# Altium PCB Mecabot_PCB.PcbDoc
Units mm, origin at the board's own origin, x right, y up, seen from the top; angles counter-clockwise.
Board outline 101.4 x 86.36 mm, 2 copper layers (Top Layer, Bottom Layer); 75 components, 54 nets, 283 pads, 69 vias.
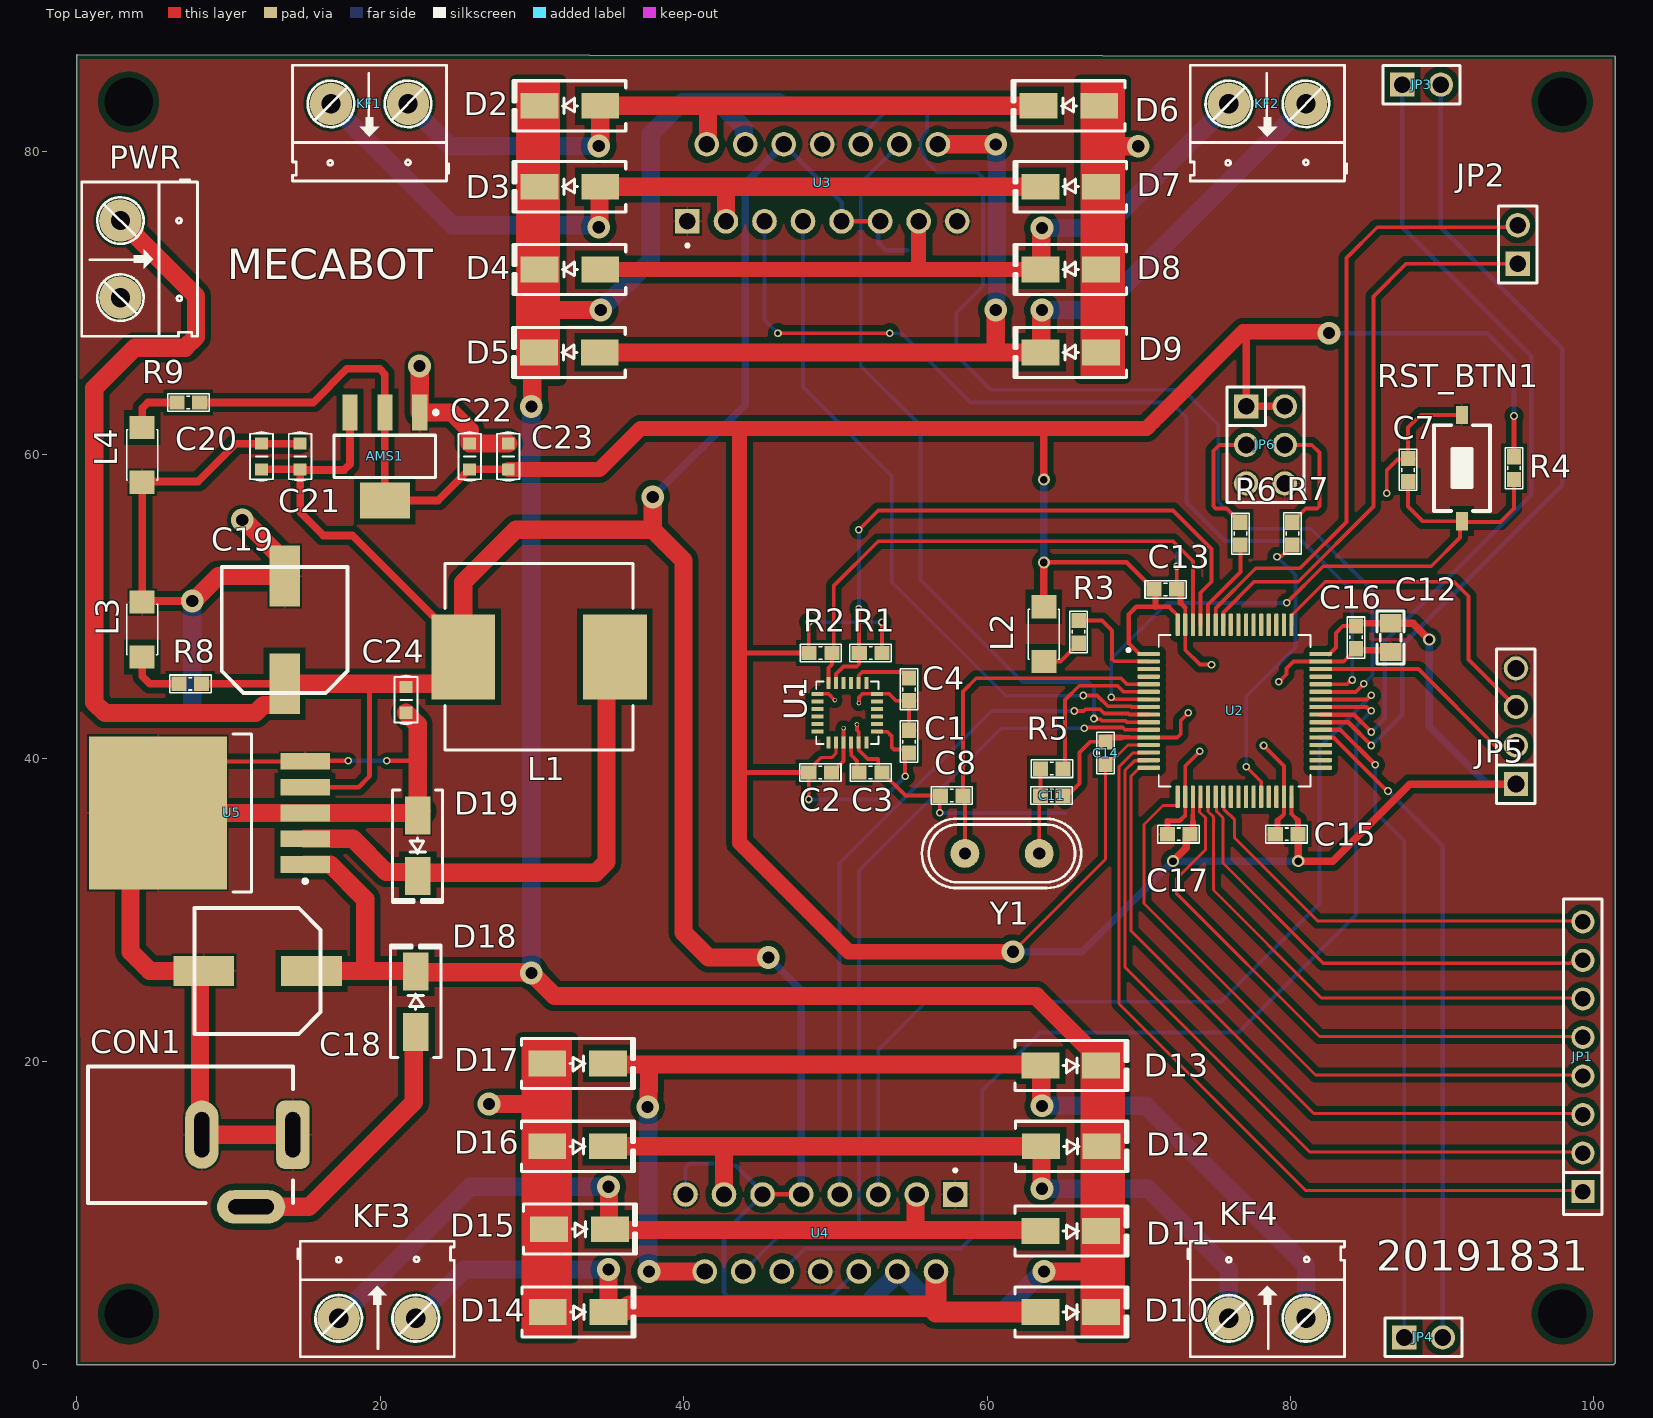
[diagram p0: Top Layer view]
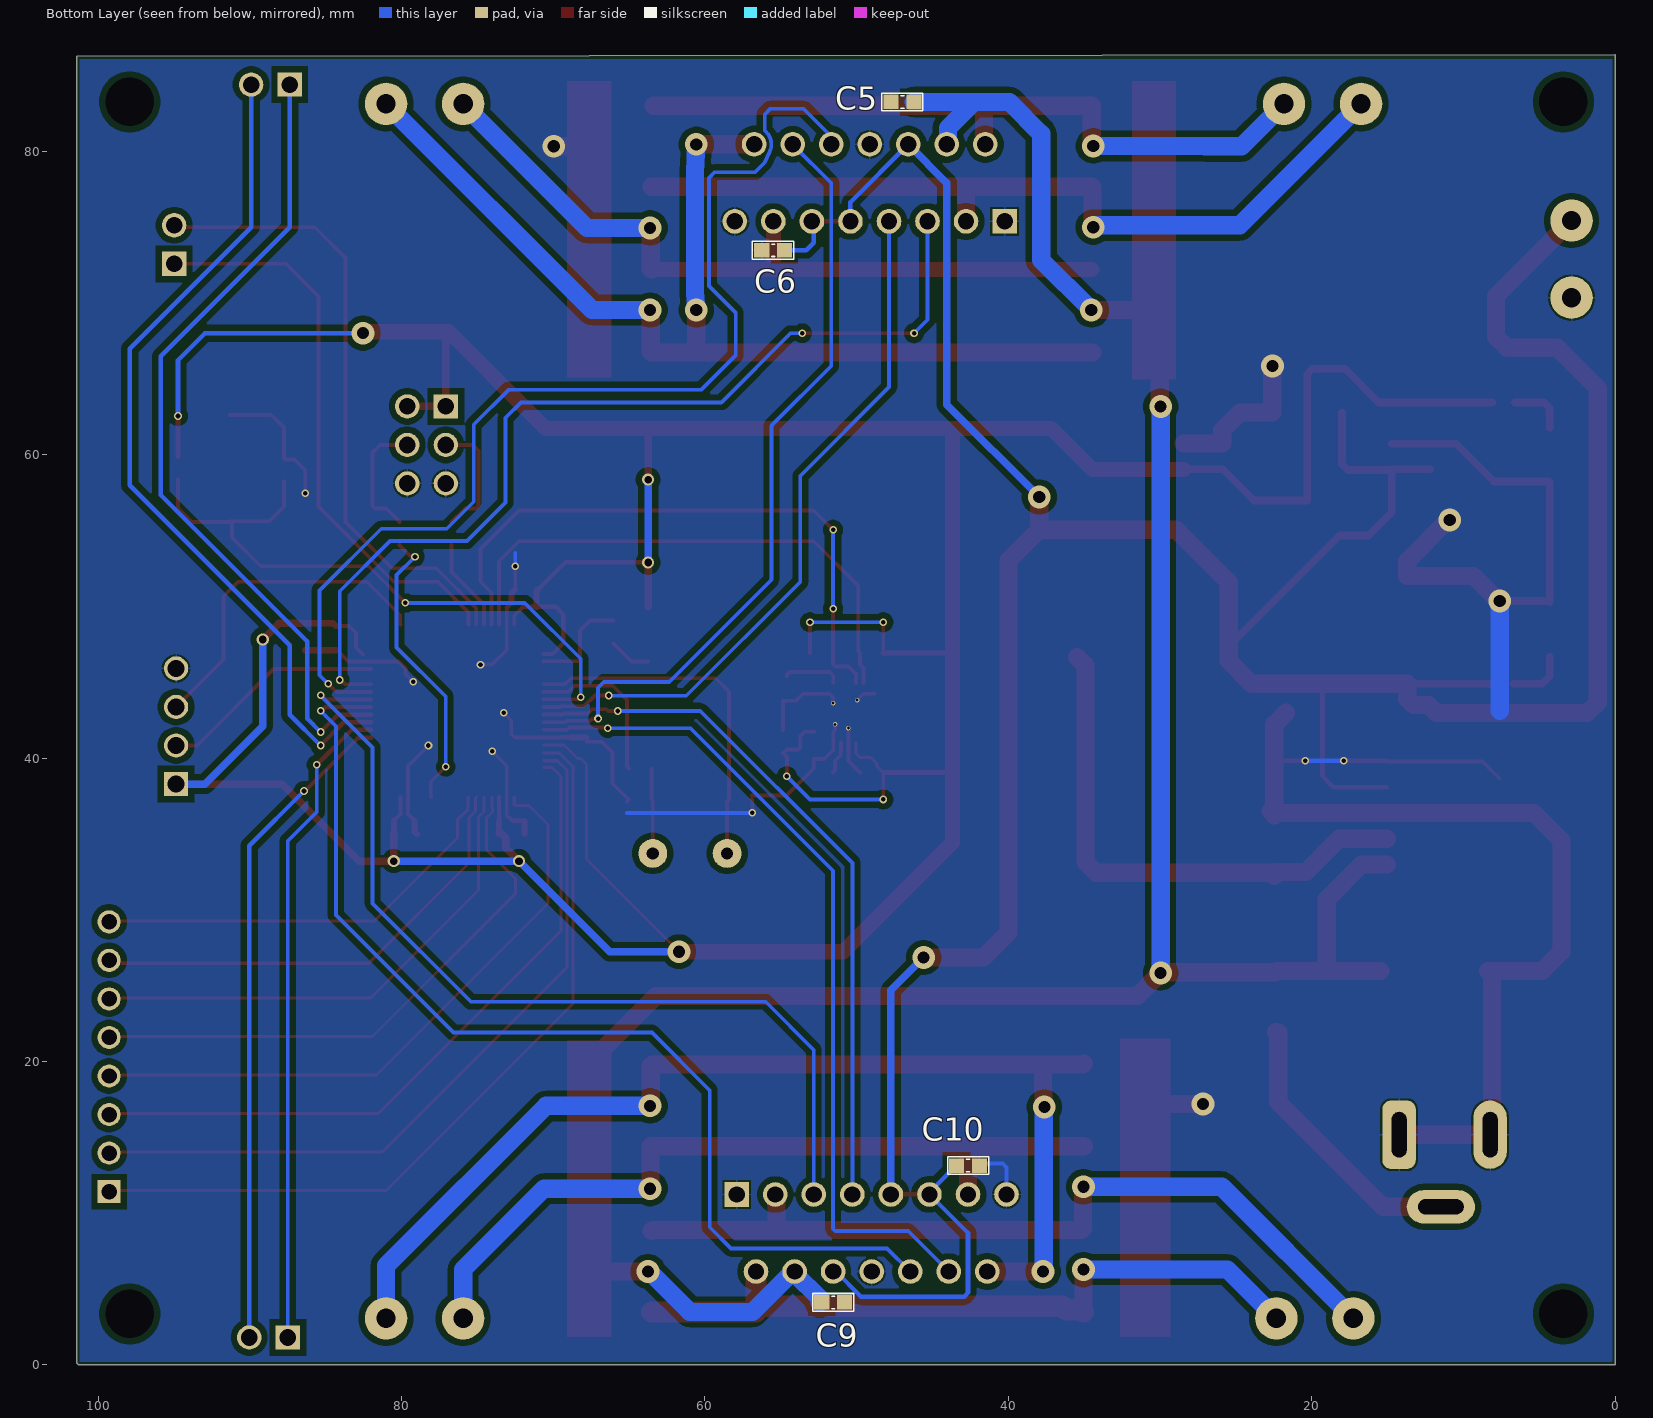
[diagram p1: Bottom Layer view, seen from below]
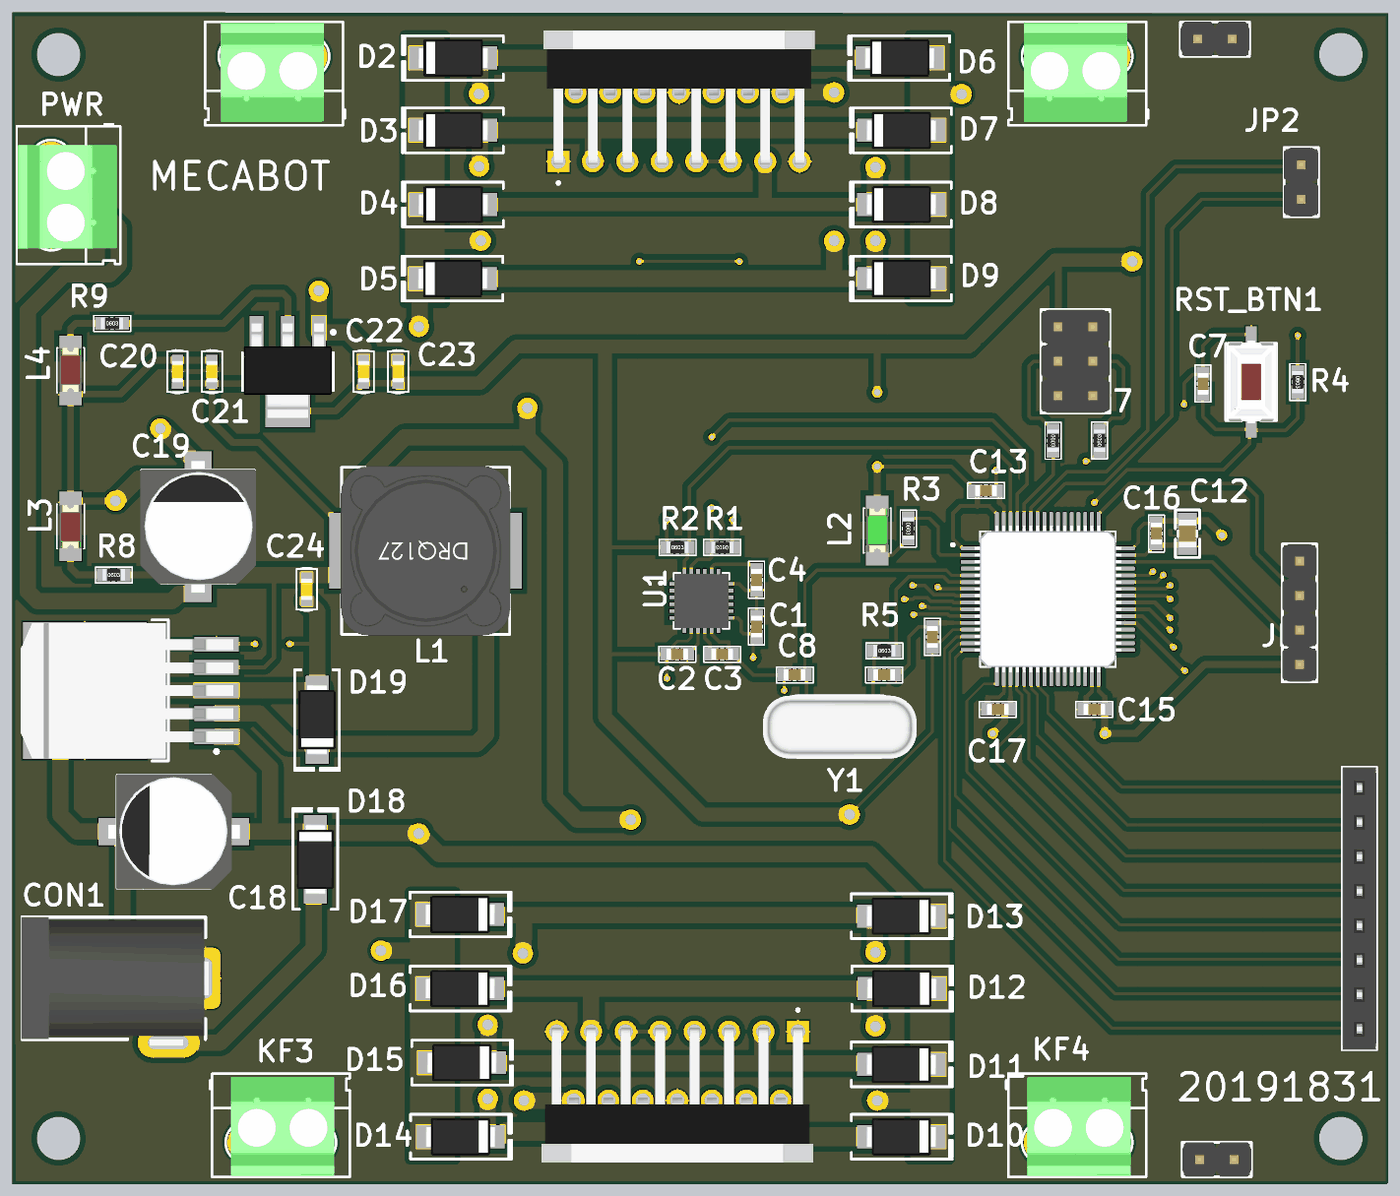
[diagram p2: 3D render of the assembled board from above, using the file's embedded part models]
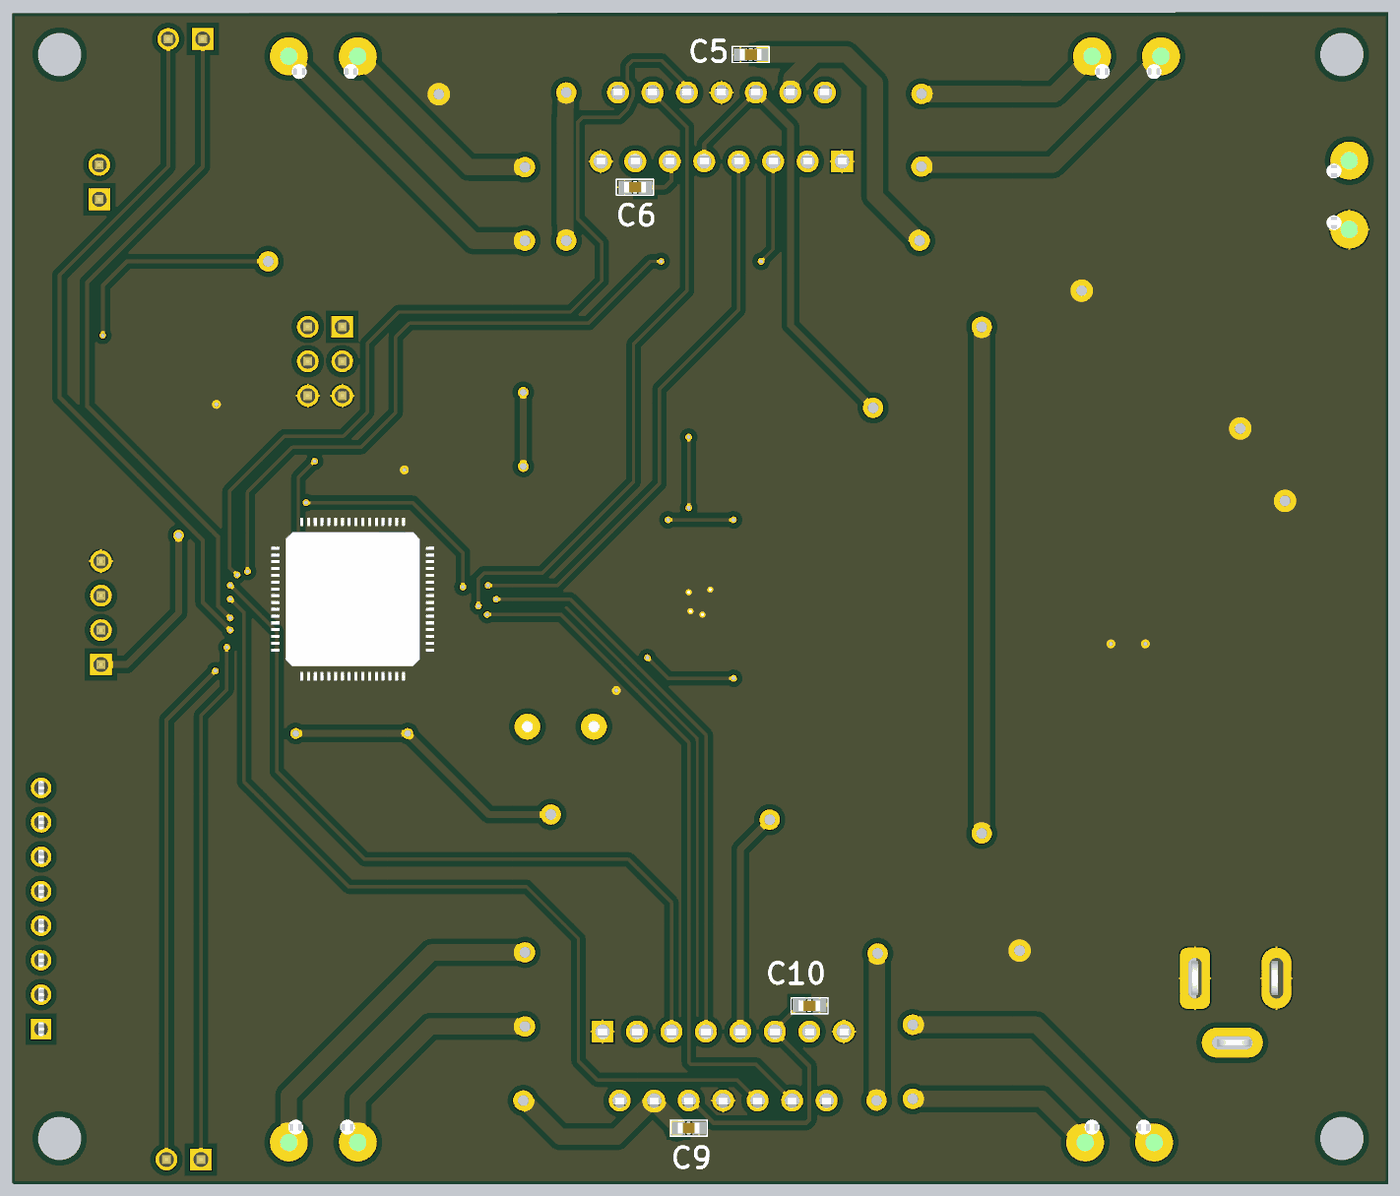
[diagram p3: 3D render of the assembled board from below, using the file's embedded part models]

## Layer stack, top to bottom
Top Solder: solder mask 0.0102, Solder Resist, Dk 3.5
Top Layer: signal copper 0.0356
Dielectric 1: dielectric 0.32, FR-4, Dk 4.8
Bottom Layer: signal copper 0.0356
Bottom Solder: solder mask 0.0102, Solder Resist, Dk 3.5

## Board outline
0.027,86.356 0,86.329 0,0 101.275,0 101.4,0.125 101.4,86.275

## Design rules (kind name [scope] priority, off if disabled: settings)
BoardOutlineClearance [All] p1: gap=0.2 ignorepadtopadclearanceinfootprint=FALSE
Clearance [All] p1: gap=0.2 ignorepadtopadclearanceinfootprint=FALSE
ComponentClearance [All] p1: gap=0.127 collisioncheckmode=3 verticalgap=0.127 showdistances=TRUE
DiffPairsRouting [All] p1: maxlimit=0.254 minlimit=0.127 mostfreqgap=0.127 toplayer_minwidth=0.127 toplayer_maxwidth=25.4 toplayer_prefwidth=0.127 bottomlayer_minwidth=0.127 bottomlayer_maxwidth=25.4 bottomlayer_prefwidth=0.127 maxuncoupledlength=12.7
Height [All] p1: minheight=0 maxheight=1816.048 prefheight=12.7
HoleSize [All] p1: absolutevalues=TRUE maxlimit=6.3 minlimit=0.2 maxpercent=80.000 minpercent=20.000
HoleToHoleClearance [All] p1: gap=0.25 allowstackedmicrovias=FALSE
MinimumAnnularRing [All] p1: minimumring=0.05
MinimumSolderMaskSliver [All] p1: minsoldermaskwidth=0
PlaneClearance [All] p1: clearance=0.127
PlaneConnect PlaneConnectPowerPads [InPadClass('PowerPads')] p1: planeconnectstyle=Direct reliefexpansion=0.508 reliefentries=4 reliefconductorwidth=0.254 reliefairgap=0.254
PlaneConnect [All] p2: pad.planeconnectstyle=Relief pad.reliefexpansion=0.3 pad.reliefentries=4 pad.reliefconductorwidth=0.127 pad.reliefairgap=0.127 via.planeconnectstyle=Direct via.reliefexpansion=0.3 via.reliefentries=4 via.reliefconductorwidth=0.127 via.reliefairgap=0.127
PolygonConnect PolygonConnectPowerPads [All vs (InPadClass('PowerPads'))] p1: connectstyle=Direct reliefconductorwidth=0.254 reliefentries=4 polygonreliefangle="90 Angle" airgapwidth=0.254
PolygonConnect [All] p2: thpad.connectstyle=Relief thpad.reliefconductorwidth=0.127 thpad.reliefentries=4 thpad.polygonreliefangle="90 Angle" thpad.airgapwidth=0.127 smdpad.connectstyle=Relief smdpad.reliefconductorwidth=0.127 smdpad.reliefentries=4 smdpad.polygonreliefangle="90 Angle" smdpad.airgapwidth=0.127 via.connectstyle=Direct via.reliefconductorwidth=0.127 via.reliefentries=4 via.polygonreliefangle="90 Angle" via.airgapwidth=0.127
RoutingVias [All] p1: holewidth=0.3 width=0.5 viastyle="Through Hole" minholewidth=0.2 minwidth=0.3 maxholewidth=0.8 maxwidth=1.5
SilkToSilkClearance [All] p1: silktosilkclearance=0
SilkToSolderMaskClearance [IsPad] p1: minsilkscreentomaskgap=0.04 clearancetoexposedcopper=TRUE
SolderMaskExpansion [All] p1: expansion=0.075 istentingtop=FALSE
UnRoutedNet [All] p1: checkbadconnections=TRUE
Width [All] p1: maxlimit=2 minlimit=0.127 preferedwidth=0.3 minimp=50.000000 maximp=50.000000 favimp=50.000000
19 further rules are at their usual default settings.

## Components (designator, comment, footprint, x,y, rotation, side; value= is the part's Value field where it differs from the comment)
AMS1 "AMS1117-3.3V" SOT223 20.308,59.879 r180 top value="AMS1117-3.3V SOT223"
C1 "100nF" "tu 0603" 54.852,41.083 r90 top
C2 "10nF" "tu 0603" 48.998,39.051 r0 top
C3 "100nF" "tu 0603" 52.312,39.051 r0 top
C4 "2.2nF" "tu 0603" 54.852,44.524 r90 top
C5 "100nF" "tu 0603" 46.978,83.247 r0 bottom
C6 "100nF" "tu 0603" 55.499,73.468 r0 bottom
C7 "100nF" "tu 0603" 87.745,58.99 r90 top
C8 "20pF" "tu 0603" 57.658,37.527 r0 top
C9 "100nF" "tu 0603" 51.55,4.126 r180 bottom
C10 "100nF" "tu 0603" 42.66,13.143 r180 bottom
C11 "20pF" "tu 0603" 64.262,37.527 r180 top
C12 "4.7uF" "tu 0805" 86.602,47.941 r270 top
C13 "100nF" "tu 0603" 71.755,51.116 r0 top
C14 "100nF" "tu 0603" 67.806,40.321 r90 top
C15 "100nF" "tu 0603" 79.744,34.987 r180 top
C16 "100nF" "tu 0603" 84.316,47.953 r270 top
C17 "100nF" "tu 0603" 72.632,34.987 r180 top
C18 "100uF" "tu nhom 8 (f)" 11.92,25.97 r180 top
C19 "220uF" "tu nhom 8 (f)" 13.704,48.449 r90 top
C20 "10uF" "C 0603" 12.18,59.879 r90 top
C21 "100nF" "C 0603" 14.72,59.879 r90 top
C22 "10uF" "C 0603" 25.896,59.879 r90 top
C23 "100nF" "C 0603" 28.436,59.879 r90 top
C24 "0.1uF" "C 0603" 21.705,43.838 r270 top
CON1 "CON DC PWR" CONN/DC/PWR/5.0MM 14.243,15.175 r0 top
D2 "M7" "DIODE SMA" 32.5,82.993 r180 top
D3 "M7" "DIODE SMA" 32.5,77.659 r180 top
D4 "M7" "DIODE SMA" 32.5,72.198 r180 top
D5 "M7" "DIODE SMA" 32.468,66.737 r180 top
D6 "M7" "DIODE SMA" 65.393,82.993 r180 top
D7 "M7" "DIODE SMA" 65.52,77.659 r180 top
D8 "M7" "DIODE SMA" 65.52,72.198 r180 top
D9 "M7" "DIODE SMA" 65.52,66.737 r180 top
D10 "M7" "DIODE SMA" 65.52,3.491 r0 top
D11 "M7" "DIODE SMA" 65.52,8.825 r0 top
D12 "M7" "DIODE SMA" 65.552,14.413 r0 top
D13 "M7" "DIODE SMA" 65.52,19.747 r0 top
D14 "M7" "DIODE SMA" 33.04,3.491 r0 top
D15 "M7" "DIODE SMA" 33.135,8.952 r0 top
D16 "M7" "DIODE SMA" 33.008,14.413 r0 top
D17 "M7" "DIODE SMA" 33.008,19.874 r0 top
D18 "SS34" "DIODE SMA" 22.34,23.938 r90 top
D19 "SS34" "DIODE SMA" 22.467,34.225 r270 top
JP1 "JP 1x8 2.54" "JP 1x8 CT" 99.27,11.427 r90 top
JP2 "JP 1x2 2.54" "JP 1x2 DT" 94.984,72.579 r90 top
JP3 "JP 1x2 2.54" "JP 1x2 DT" 87.364,84.39 r0 top
JP4 "JP 1x2 2.54" "JP 1x2 DT" 87.491,1.813 r0 top
JP5 "SWD" "JP 1x4 DT" 94.857,38.289 r90 top
JP6 "JP 2x3 2.54" "JP 2x3 DT" 78.347,60.641 r270 top
KF1 "CON 2 KF301" "Con 2 KF301 5.08" 21.832,83.12 r180 top
KF2 "CON 2 KF301" "Con 2 KF301 5.08" 81.014,83.12 r180 top
KF3 "CON 2 KF301" "Con 2 KF301 5.08" 17.26,3.072 r0 top
KF4 "CON 2 KF301" "Con 2 KF301 5.08" 75.934,3.072 r0 top
L1 "33uH 3A" "Inductor SMD 12x12x8" 30.468,46.671 r180 top
L2 "LED 0805" LED-1206-Green 63.742,49.973 r270 top
L3 "LED 0805" LED-1206-Red 4.306,46.671 r90 top
L4 "LED 0805" LED-1206-Red 4.306,61.784 r270 top
PWR "CON 2 KF301" "Con 2 KF301 5.08" 2.875,75.43 r270 top (schematic designator KF5)
R1 "4k7" "tro smd 0603" 52.324,46.925 r180 top
R2 "4k7" "tro smd 0603" 49.022,46.925 r0 top
R3 "1k" "tro smd 0603" 66.028,48.322 r270 top
R4 "10k" "tro smd 0603" 94.73,59.117 r270 top
R5 "0R" "tro smd 0603" 64.262,39.305 r0 top
R6 "10k" "tro smd 0603" 76.696,54.799 r270 top
R7 "10k" "tro smd 0603" 80.125,54.799 r90 top
R8 "1k" "tro smd 0603" 7.481,44.893 r0 top
R9 "1k" "tro smd 0603" 7.354,63.435 r0 top
RST_BTN1 "Nut Nhan 2 Chan SMD 3x6x2.5" "Nut Nhan 2 Chan SMD 3x6x2.5" 91.301,59.117 r90 top
U1 "MPU-6050" QFN50P400X400X95-24N 50.788,42.988 r0 top
U2 "STM32F103RCT6" QFP50P1200X1200X160-64N 76.315,43.115 r0 top
U3 "L298N" L298N 40.247,75.373 r90 top
U4 "L298N" L298N 57.9,11.238 r270 top
U5 "LM2596S-5.0" TO-263-5 8.751,36.384 r180 top
Y1 "8Mhz" "Thach Anh 2 chan cam" 60.985,33.717 r0 top value=4Mhz

## Footprints (in the part's own frame and the unit in brackets; to place one, negate y for a bottom-side part, rotate by r counter-clockwise, add the part's x,y. Pads: shape width x height; smd on the part's side, far side on the other; paste and mask are expansions set on the pad)
"C 0603" [mm] "Chip Capacitor, 2-Leads, Body 1.6x0.8mm, IPC Medium Density"
  rect 0.8x0.85 smd: 1(-0.85,0) 2(0.85,0)
  silkscreen extent -1.6,-0.75 1.6,0.75, body extent -0.8,-0.43 0.8,0.43, height 0.81
"Con 2 KF301 5.08" [mil]
  round 110 hole 50: 1(0,0) 2(200,0)
  silkscreen extent -106,-100 300,200, body extent -45,-97 255,190, height 335
CONN/DC/PWR/5.0MM [mm]
  rrect50% 2.2x4.5 hole 1 slot 3 at 90 deg: 1(0,0)
  oval 2.2x4.5 hole 1 slot 3 at 90 deg: 2(-6,0)
  oval 4.5x2.2 hole 1 slot 3 at 0 deg: 3(-2.75,-4.75)
  silkscreen extent -13.5,-4.5 0,4.5, body extent -13.58,-5 0.25,4.5, height 11.02
"DIODE SMA" [mm] "SMA"
  rect 2.5x1.7 smd: 1(-2,0) 2(2,0)
  silkscreen extent -3.68,-1.65 3.75,1.65, body extent -2.6,-1.37 2.6,1.37, height 2.4
"Inductor SMD 12x12x8" [mm] "Precision Wire Wound Inductor, 2-Leads, Body 12.3x12.3mm, IPC Low Density"
  rect 4.2x5.6 smd: 1(-5,0) 2(5,0)
  silkscreen extent -6.2,-6.15 6.2,6.15, body extent -6.25,-6.25 6.25,6.25, height 8.01
"JP 1x2 DT" [mm] "2 pins, 1 row, straight, gold plating"
  rect 1.6x1.6 hole 1.1: 1(0,0)
  round 1.6 hole 1.1: 2(2.54,0)
  silkscreen extent -1.27,-1.27 3.81,1.27, body extent -1.27,-1.27 3.81,1.27, height 8.54
"JP 1x4 DT" [mm] "4 pins, 1 row, straight, gold plating"
  rect 1.6x1.6 hole 1.1: 1(0,0)
  round 1.6 hole 1.1: 2(2.54,0) 3(5.08,0) 4(7.62,0)
  silkscreen extent -1.27,-1.27 8.89,1.27, body extent -1.27,-1.27 8.89,1.27, height 8.54
"JP 1x8 CT" [mm] "8 row, straight, gold plating"
  rect 1.52x1.52 hole 1.02: 1(0,0)
  round 1.52 hole 1.02: 2(2.54,0) 3(5.08,0) 4(7.62,0) 5(10.16,0) 6(12.7,0) 7(15.24,0) 8(17.78,0)
  silkscreen extent -1.52,-1.27 19.3,1.27, body extent -1.52,-1.25 19.3,1.25, height 8.51
"JP 2x3 DT" [mm]
  rect 1.6x1.6 hole 1.1: 1(-2.54,-1.27)
  round 1.6 hole 1.1: 2(0,-1.27) 3(2.54,-1.27) 4(2.54,1.27) 5(0,1.27) 6(-2.54,1.27)
  silkscreen extent -3.81,-2.54 3.81,2.54, body extent -3.81,-2.54 3.81,2.54, height 8.55
L298N [mm]
  rect 1.62x1.62 hole 1.08: 1(0,0)
  round 1.62 hole 1.08: 2(5.08,-1.27) 3(0,-2.54) 4(5.08,-3.81) 5(0,-5.08) 6(5.08,-6.35) 7(0,-7.62) 8(5.08,-8.89) 9(0,-10.16) 10(5.08,-11.43) 11(0,-12.7) 12(5.08,-13.97) 13(0,-15.24) 14(5.08,-16.51) 15(0,-17.78)
  silkscreen extent -1.69,-0.1 -1.49,0.1, body extent -0.24,-18.89 9.65,1.11, height 23.85
LED-1206-Green [mil]
  rect 60x65 smd: 1(0,0) 2(142,0)
  silkscreen extent 6,-40 136,40, body extent 7,-31 133,32, height 43
LED-1206-Red [mil]
  rect 60x65 smd: 1(0,0) 2(142,0)
  silkscreen extent 6,-40 136,40, body extent 7,-31 133,32, height 43
"Nut Nhan 2 Chan SMD 3x6x2.5" [mm] "Switch SMD type"
  rect 1.2x0.8 smd: 1(-3.5,0) 2(3.5,0)
  silkscreen extent -2.82,-1.85 2.82,1.85, body extent -3.05,-1.85 3.05,1.85, height 2.5
QFN50P400X400X95-24N [mm]
  rect 0.79x0.26 smd: 1(-1.97,1.25) 2(-1.97,0.75) 3(-1.97,0.25) 4(-1.97,-0.25) 5(-1.97,-0.75) 6(-1.97,-1.25) 13(1.97,-1.25) 14(1.97,-0.75) 15(1.97,-0.25) 16(1.97,0.25) 17(1.97,0.75) 18(1.97,1.25)
  rect 0.26x0.79 smd: 7(-1.25,-1.97) 8(-0.75,-1.97) 9(-0.25,-1.97) 10(0.25,-1.97) 11(0.75,-1.97) 12(1.25,-1.97) 19(1.25,1.97) 20(0.75,1.97) 21(0.25,1.97) 22(-0.25,1.97) 23(-0.75,1.97) 24(-1.25,1.97)
  silkscreen extent -3.1,-2.05 2.05,2.05, body extent -2,-2 2,2, height 0.93
QFP50P1200X1200X160-64N [mm]
  rrect50% 1.49x0.28 smd: 1(-5.67,3.75) 2(-5.67,3.25) 3(-5.67,2.75) 4(-5.67,2.25) 5(-5.67,1.75) 6(-5.67,1.25) 7(-5.67,0.75) 8(-5.67,0.25) 9(-5.67,-0.25) 10(-5.67,-0.75) 11(-5.67,-1.25) 12(-5.67,-1.75) 13(-5.67,-2.25) 14(-5.67,-2.75) 15(-5.67,-3.25) 16(-5.67,-3.75) 33(5.67,-3.75) 34(5.67,-3.25) 35(5.67,-2.75) 36(5.67,-2.25) 37(5.67,-1.75) 38(5.67,-1.25) 39(5.67,-0.75) 40(5.67,-0.25) 41(5.67,0.25) 42(5.67,0.75) 43(5.67,1.25) 44(5.67,1.75) 45(5.67,2.25) 46(5.67,2.75) 47(5.67,3.25) 48(5.67,3.75)
  rrect50% 0.28x1.49 smd: 17(-3.75,-5.67) 18(-3.25,-5.67) 19(-2.75,-5.67) 20(-2.25,-5.67) 21(-1.75,-5.67) 22(-1.25,-5.67) 23(-0.75,-5.67) 24(-0.25,-5.67) 25(0.25,-5.67) 26(0.75,-5.67) 27(1.25,-5.67) 28(1.75,-5.67) 29(2.25,-5.67) 30(2.75,-5.67) 31(3.25,-5.67) 32(3.75,-5.67) 49(3.75,5.67) 50(3.25,5.67) 51(2.75,5.67) 52(2.25,5.67) 53(1.75,5.67) 54(1.25,5.67) 55(0.75,5.67) 56(0.25,5.67) 57(-0.25,5.67) 58(-0.75,5.67) 59(-1.25,5.67) 60(-1.75,5.67) 61(-2.25,5.67) 62(-2.75,5.67) 63(-3.25,5.67) 64(-3.75,5.67)
  silkscreen extent -7.1,-5 5,5, body extent -6,-6 6,6, height 0.72
SOT223 [mm]
  rect 1x2.4 smd: 1(-2.3,-2.9) 2(0,-2.9) 3(2.3,-2.9)
  rect 3.3x2.4 smd: 4(0,2.9)
  silkscreen extent -3.48,-3.02 3.35,1.4, body extent -3.25,-3.56 3.25,3.4, height 1.68
"Thach Anh 2 chan cam" [mm]
  round 1.905 hole 0.8: 1(-2.45,0) 2(2.45,0)
  silkscreen extent -5.28,-2.29 5.21,2.29, body extent -5.68,-2.36 5.68,2.29, height 3.5
TO-263-5 [mm] "D2-PAK, 6-Pads, Body 8.9x10.4mm (max), IPC Medium Density"
  rect 3.25x1.1 smd: 1(-6.3,3.4) 2(-6.3,1.7) 3(-6.3,0) 4(-6.3,-1.7) 5(-6.3,-3.4)
  rect 9.1x10.1 smd: 6(3.4,0)
  silkscreen extent -6.43,-5.2 -1.55,5.2, body extent -7.56,-4.98 8.11,5.02, height 4.83
"tro smd 0603" [mm] "Chip Capacitor, 2-Leads, Body 1,60x0,80mm, IPC Medium Density"
  rect 1x0.95 smd mask+0.076: 1(-0.75,0) 2(0.75,0)
  silkscreen extent -1.35,-0.58 1.37,0.58, body extent -0.82,-0.42 0.82,0.43, height 0.44
"tu 0603" [mm] "Chip Capacitor, 2-Leads, Body 1,60x0,80mm, IPC Medium Density"
  rect 1x0.95 smd mask+0.076: 1(-0.75,0) 2(0.75,0)
  silkscreen extent -1.35,-0.58 1.37,0.58, body extent -0.8,-0.4 0.8,0.4, height 0.9
"tu 0805" [mm] "Compoment SMD 80x50mil"
  rect 1.2x1.4 smd: 1(-0.946,-0.003) 2(0.954,-0.003)
  silkscreen extent -1.75,-0.89 1.75,0.89, body extent -1.01,-0.64 1.01,0.63, height 0.61
"tu nhom 8 (f)" [mm]
  rect 4x2 smd: 1(-3.55,0) 2(3.55,0)
  silkscreen extent -4.15,-4.15 4.15,4.15, body extent -4.85,-4.25 4.85,4.25, height 10.5

## Part data
AMS1: library part "AMS1117 SMD", "Dán", Chung_Loai=Dán, Don_Vi=Con, Ma_Hang=MH000596
C1 C3 C5 C6 C7 C8 C9 C10 C11 C13 C14 C15 C16 C17: library part "Tu 0603 104 50V 10%", "Dán", Chung_Loai=Dán, Don_Vi=Con, Ma_Hang=MH004568, So_Chan=2, Ten_Linh_Kien="Tụ 0603 104-100nF 10% 50V"
C2: library part "Tu 0603 103 50V 10%", "Dán", Chung_Loai=Dán, Don_Vi=Con, Ma_Hang=MH004567, So_Chan=2, Ten_Linh_Kien="Tụ 0603 103-10nF 10% 50V"
C4: library part "Tu 0603 22pF 50V 10%", "Dán", Chung_Loai=Dán, Don_Vi=Con, Ma_Hang=MH004570, So_Chan=2, Ten_Linh_Kien="Tụ 0603 22pF 50V 10%"
C12: library part "Tu 0805 475 25V 20%", "Dán", Chung_Loai=Dán, Don_Vi=Con, Ma_Hang=MH004276, So_Chan=2, Ten_Linh_Kien="Tụ 0805 475-4.7uF 20% 25V"
C18: library part "Tu Nhom 100uF 50V", "Dán", Chung_Loai=Dán, Don_Vi=Con, Ma_Hang=MH002223, So_Chan=2, Ten_Linh_Kien="Tụ Nhôm 100uF 50V 8x10.2MM"
C19: library part "Tu Nhom 220uF 25V", "Dán", Chung_Loai=Dán, Don_Vi=Con, Ma_Hang=MH002221, So_Chan=2, Ten_Linh_Kien="Tụ Nhôm 220uF 25V"
C20 C21 C22 C23 C24: library part "Capacitor NP", "Capacitor non-pol"
CON1: "DC input connector"
D2 D3 D4 D5 D6 D7 D8 D9 D10 D11 D12 D13 D14 D15 D16 D17: library part "Diode M7 ( 4007 )", "Dán", Chung_Loai=Dán, Don_Vi=Con, Ma_Hang=MH000944, Ten_Linh_Kien="Diode M7 1N4007 SMD 1A 1000V"
D18 D19: library part "Diode SS34 ( 1N5822 )", "Dán", Chung_Loai=Dán, Don_Vi=Con, Ma_Hang=MH002104, Ten_Linh_Kien="Diode SS34 3A 40V SMA ( 1N5822 SS34A)"
JP1: library part "JP 1x8 2.54 Cai Thang", "Cắm", Chung_Loai=Cắm, Don_Vi=Con, Ma_Hang=MH004006, Ten_Linh_Kien="Jump Đơn Cái 2.54MM 1x20P Thẳng"
JP2: library part "JP 1x2 2.54 Duc Cong", "Cắm", Chung_Loai=Cắm, Don_Vi=Con, Ma_Hang=MH000904, Ten_Linh_Kien="Jump Đơn Đực 2.54MM 1x40P Cong Đứng"
JP3 JP4: library part "JP 1x2 2.54 Duc Thang", "Cắm", Chung_Loai=Cắm, Don_Vi=Con, Ma_Hang=MH000903, Ten_Linh_Kien="Jump Đơn Đực 2.54MM 1x40P Thẳng 11MM"
JP5: library part "JP 1x4 2.54 Duc Cong", "Cắm", Chung_Loai=Cắm, Don_Vi=Con, Ma_Hang=MH000904, Ten_Linh_Kien="Jump Đơn Đực 2.54MM 1x40P Cong Đứng"
JP6: library part "JP 2x3 2.54 Duc Thang", "Cắm", Chung_Loai=Cắm, Don_Vi=Con, Ma_Hang=MH002686, Ten_Linh_Kien="Jump Đôi Đực 2.54MM 2x40P Thẳng 11MM"
KF1 KF2 KF3 KF4 PWR: "Cắm", Chung_Loai=Cắm, Don_Vi=Con, Ma_Hang=MH000987, Ten_Linh_Kien="CON 2 KF301-2P 5.08MM Xanh Dương"
L1: library part Inductor, "Inductor"
L2: library part "LED 1206 Xanh La", "Dán", Chung_Loai=Dán, Don_Vi=Con, Ma_Hang=MH002947, Ten_Linh_Kien="LED1206 Màu Xanh Lá (Green)"
L3 L4: library part "LED 1206 Do", "Dán", Chung_Loai=Dán, Don_Vi=Con, Ma_Hang=MH002334, Ten_Linh_Kien="LED1206 Màu Đỏ (Red)"
R1 R2 R3 R4 R5 R6 R7 R8 R9: library part "Tro 0603 1% 0R", "Dán", Chung_Loai=Dán, Don_Vi=Con, Ma_Hang=MH005792, So_Chan=2, Ten_Linh_Kien="Trở 0603 1% 0R"
U1: "MPU-6050 series Accelerometer, Gyroscope, 3 Axis Sensor Evaluation Board", PACKAGE="QFN-24 InvenSense", Availability="In Stock", Check_prices=https://www.snapeda.com/parts/MPU-6050/TDK+InvenSense/view-part/?ref=eda, MF="TDK InvenSense", MP=MPU-6050, Price=None, Purchase-URL=https://pricing.snapeda.com/search/part/MPU-6050/?ref=eda, SnapEDA_Link=https://www.snapeda.com/parts/MPU-6050/TDK+InvenSense/view-part/?ref=snap
U2: "ARMÂ® CortexÂ®-M3 STM32F1 Microcontroller IC 32-Bit 72MHz 256KB (256K x 8) FLASH 64-LQFP (10x10)", PACKAGE="LQFP-64 STMicroelectronics", Availability="In Stock", Check_prices=https://www.snapeda.com/parts/STM32F103RCT6/STMicroelectronics/view-part/?ref=eda, MF=STMicroelectronics, MP=STM32F103RCT6, Price=None, Purchase-URL=https://pricing.snapeda.com/search/part/STM32F103RCT6/?ref=eda, SnapEDA_Link=https://www.snapeda.com/parts/STM32F103RCT6/STMicroelectronics/view-part/?ref=snap
U3 U4: "Half Bridge _4_ Driver DC Motors, Relays, Solenoids, Stepper Motors Bipolar 15-Multiwatt", PACKAGE="Multiwatt-15 STMicroelectronics", Availability=Unavailable, MF=STMicroelectronics, MP=L298N, Price=None, SnapEDA_Link=https://www.snapeda.com/parts/L298N/STMicroelectronics/view-part/294022/?ref=snap
U5: "Simple Switcher 3A Step-Down Voltage Regulator"
Y1: library part "Thach Anh 2 chan Cam", "Crystal For all Crystal 2pin."
RST_BTN1: Ma_Hang=MH001036, Ten="Nút Nhấn 2 Chân 3x6x2.5MM SMD"

## Free pads (board coordinates)
  round 1.524 hole 3.2 unplated: 2(3.417,3.364) 2(3.417,83.247) 2(97.905,3.364) 2(97.905,83.247)

## Via types
v1: diameter 0.5, hole 0.3, Top Layer to Bottom Layer, 35 vias
v2: diameter 1.5, hole 0.8, Top Layer to Bottom Layer, 25 vias
v3: diameter 0.8, hole 0.5, Top Layer to Bottom Layer, 5 vias
v4: diameter 0.3, hole 0.2, Top Layer to Bottom Layer, 4 vias

## Nets (pads, with @x,y where several pads share a name; then routed paths per layer and width w, separated by ;. In a path a pad name is that pad's centre, name@x,y a point inside that pad or via, vN(x,y) a via of type N, cw(c..) or ccw(c..) an arc to the next point about the centre after c; other vN are vias at no path point)
+3V3: AMS1.2 AMS1.4 C1.1 C2.1 C12.1 C13.1 C14.1 C15.1 C16.1 C17.1 C22.1 C23.1 JP5.1 JP6.1 JP6.6 L2.1 R1.1 R2.1 R4.1 R9.2 U1.8 U1.13 U2.1 U2.13 U2.19 U2.32 U2.48 U2.64 | length 313.9
  Top Layer w0.2: C2.1 48.273,39.051 48.648,39.426 48.648,39.633 49.041,40.026 49.752,40.026 50.038,40.312 U1.8 ; v2(61.71,27.24) 67.806,33.336 C14.1 67.806,39.596 68.181,39.971 68.396,39.971 69.29,40.865 U2.13
  Top Layer w0.25: v1(48.248,37.273) C2.1 ; v1(48.248,48.957) 48.248,46.949 R2.1 ; U1.13 53.435,41.738 53.709,41.464 53.709,40.721 53.855,40.575 54.61,40.575 C1.1 54.598,40.079 v1(54.598,38.797) ; R1.1 v1(53.074,48.957) ; 69.33,47.575 70.04,46.865 U2.1 ; 71.997,49.973 71.997,49.958 72.565,49.39 U2.64 ; 73.565,36.257 U2.19 ; 80.065,36.317 U2.32 ; U2.48@82.538,46.83 82.992,47.284 82.992,48.249 83.446,48.703 C16.1
  Top Layer w0.3: 43.675,39.125 43.749,39.051 C2.1 ; 43.675,46.875 43.725,46.925 R2.1 ; v3(63.742,52.894) 69.202,52.894 70.98,51.116 C13.1 ; 69.33,47.575 69.33,49.465 69.838,49.973 71.108,49.973 71.997,49.973 ; 73.565,35.832 73.565,36.257 ; 80.065,36.317 80.506,35.876 ; R4.1 v1(94.73,62.546)
  Top Layer w0.4: C13.1 71.108,51.013 71.108,49.973 ; C17.1@73.565,35.058 73.565,35.832 ; C15.1 80.506,34.999 80.506,35.876 ; C16.1 84.5,48.887 C12.1
  Top Layer w0.5: R9.2 15.585,63.435 17.8,65.65 19.957,65.65 20.308,65.299 AMS1.2 AMS1.4 23.821,56.979 25.871,59.029 C22.1 C23.1 ; 63.675,61.725 63.742,61.658 v3(63.742,58.355) ; L2.1 v3(63.742,52.894) ; 70.981,62.206 71.188,62.412 ; v3(72.251,33.209) 73.132,34.09 73.132,34.762 73.428,35.058 C17.1@73.565,35.058 ; 76.875,68.1 77.077,67.898 JP6.1 JP6.6 ; C15.1 80.5,34.981 80.5,33.215 v3(80.506,33.209) 82.792,33.209 87.872,38.289 JP5.1 ; C12.1 88.069,48.887 v3(89.142,47.814) v3@89.107,47.779
  Top Layer w1: C23.1 34.454,59.029 37.15,61.725 43.675,61.725 ; v2(61.71,27.24) 50.86,27.24 43.675,34.425 43.675,39.125 43.675,46.875 43.675,61.725 ; 70.981,62.206 70.5,61.725 63.675,61.725 43.675,61.725 ; 71.188,62.412 76.875,68.1 82.445,68.1 v2(82.538,68.007)
  Bottom Layer w0.25: v1(48.248,37.273) 53.074,37.273 v1(54.598,38.797) ; v1(48.248,48.957) v1(53.074,48.957)
  Bottom Layer w0.3: v2(82.538,68.007) 92.952,68.007 94.73,66.229 v1(94.73,62.546)
  Bottom Layer w0.5: v2(61.71,27.24) 66.282,27.24 v3(72.251,33.209) v3(80.506,33.209) ; v3(63.742,52.894) v3(63.742,58.355) ; v3(89.142,47.814) 89.142,42.099 92.952,38.289 JP5.1
+5V: AMS1.3 C6.1 C10.1 C19.1 C20.1 C21.1 C24.1 L1.2 PWR.1 R8.2 U3.6 U3.9 U3.11 U4.6 U4.9 U4.11 U5.4 | length 241.5
  Top Layer w0.25: 19.292,44.772 19.419,44.899
  Top Layer w0.3: U5.4 18.579,38.084 19.292,38.797 19.292,44.772 ; L1.2@25.468,46.399 L1.2@25.515,46.352 ; U4.11 U4.9 ; U3.9 U3.11
  Top Layer w0.5: R8.2 13.698,44.893 C19.1 ; C20.1 C21.1 ; AMS1.3 18.008,59.357 17.641,58.99 14.759,58.99 C21.1 ; L1.2@25.468,47.371 18.167,54.672 16.244,54.672 14.72,56.196 C21.1
  Top Layer w1.2: PWR.1 7.85,70.455 7.85,67.753 7.147,67.05 3.825,67.05 1.15,64.375 1.15,43.678 1.853,42.975 11.78,42.975 12.304,43.499 13.304,43.499 13.704,43.899 C19.1 19.419,44.899 23.968,44.899 25.468,46.399 L1.2 25.468,47.371 25.468,51.577 28.944,55.053 37.961,55.053 ; v2(37.961,57.212) 37.961,55.053 ; v2(45.581,26.859) 41.649,26.859 39.993,28.515 39.993,53.021 37.961,55.053
  Bottom Layer w0.3: C10.1 43.435,13.143 45.2,11.378 U4.11 42.66,8.698 42.66,4.761 42.914,4.507 49.711,4.507 51.362,6.158 U4.6 ; U3.6 50.407,76.643 U3.9 ; U3.11 52.82,75.246 52.82,73.976 53.328,73.468 C6.1
  Bottom Layer w0.5: v2(37.961,57.212) 44.047,63.298 44.047,77.903 U3.6 ; v2(45.581,26.859) 47.74,24.7 U4.9
+12V: C5.1 C9.1 C18.1 D2.2 D3.2 D4.2 D5.2 D10.2 D11.2 D12.2 D13.2 D18.2 U3.4 U4.4 U5.1 | length 152.9
  Top Layer w1.2: U5.1 16.723,32.984 19.014,30.693 19.014,25.97 ; C18.1 19.014,25.97 ; D18.2 22.388,25.89 29.913,25.89 v2(29.96,25.843) 31.484,24.319 63.234,24.319 66.917,20.636 67.552,20.636 ; D18.2@22.34,25.97 19.014,25.97 ; v2(29.96,63.181) 30.017,63.238 30.017,66.286 D5.2 ; 30.468,69.658 30.595,69.531 v2(34.532,69.531) ; v2(63.742,6.158) 66.917,6.158 67.044,6.285
  Bottom Layer w1.2: v2(29.96,25.843) v2(29.96,63.181) ; v2(34.532,69.531) 37.834,72.833 37.834,81.147 39.934,83.247 42.266,83.247 ; U3.4 43.977,80.533 43.977,81.536 42.266,83.247 ; C5.1 42.266,83.247 ; C9.1@52.427,4.126 52.427,4.381 54.09,6.044 U4.4 54.204,6.158 56.871,3.491 60.994,3.491 63.661,6.158 v2(63.742,6.158)
BOOT0: R6.2 U2.60 | length 6.1
  Top Layer w0.25: U2.60 74.565,50.128 76.696,52.259 R6.2
BOOT0_R: JP6.2 R6.1 | length 8.2
  Top Layer w0.25: R6.1 76.696,55.574 76.346,55.924 76.321,55.924 75.795,56.45 75.064,56.45 74.918,56.596 74.918,60.26 75.299,60.641 JP6.2
BOOT1: R7.1 U2.28 | length 19.5
  Top Layer w0.25: v1(77.077,39.432) 78.065,38.444 U2.28 U2.28@78.05,37.43 ; v1(79.109,53.275) 79.157,53.323 79.424,53.323 80.125,54.024 R7.1
  Bottom Layer w0.25: v1(77.077,39.432) 77.077,44.055 80.319,47.297 80.319,52.065 v1(79.109,53.275)
BOOT1_R: JP6.5 R7.2 | length 8.3
  Top Layer w0.25: JP6.5 81.395,60.641 81.903,60.133 81.903,56.596 81.757,56.45 81.001,56.45 80.125,55.574 R7.2
ENCODER_BL_TICK: JP3.2 U2.39 | length 56.1
  Top Layer w0.3: U2.39 83.796,42.365 v1(85.332,40.829)
  Bottom Layer w0.3: v1(85.332,40.829) 87.364,42.861 87.364,47.433 97.905,57.974 97.905,66.991 89.904,74.992 JP3.2
ENCODER_BR_TICK: JP4.2 U2.37 | length 43.4
  Top Layer w0.3: U2.37 81.995,41.355 82.834,41.355 86.257,37.931 86.27,37.931 86.37,37.831 v1(86.425,37.831)
  Bottom Layer w0.3: v1(86.425,37.831) 90.031,34.225 JP4.2
ENCODER_FL_TICK: JP3.1 U2.40 | length 54.4
  Top Layer w0.3: U2.40 83.18,42.865 84.185,42.865 v1(85.332,41.718)
  Bottom Layer w0.3: v1(85.332,41.718) 86.221,42.607 86.221,47.687 95.873,57.339 95.873,66.483 87.364,74.992 JP3.1
ENCODER_FR_TICK: JP4.1 U2.38 | length 43.1
  Top Layer w0.3: U2.38 82.192,41.865 82.202,41.855 83.29,41.855 v1(85.586,39.559)
  Bottom Layer w0.25: v1(85.586,39.559) 85.586,36.443 87.491,34.538 JP4.1
GND: AMS1.1 C1.2 C2.2 C3.2 C4.1 C5.2 C6.2 C7.2 C8.1 C9.2 C10.2 C11.1 C12.2 C13.2 C14.2 C15.2 C16.2 C17.2 C18.2 C19.2 C20.2 C21.2 C22.2 C23.2 C24.2 CON1.1 CON1.2 D6.1 D7.1 D8.1 D9.1 D14.1 D15.1 D16.1 D17.1 D19.1 JP5.4 JP6.3 JP6.4 L3.2 L4.2 PWR.2 RST_BTN1.2 U1.1 U1.9 U1.11 U1.18 U2.12 U2.18 U2.31 U2.47 U2.63 U3.1 U3.8 U3.15 U4.1 U4.8 U4.15 U5.3 U5.5 U5.6 | length 214.5
  Top Layer w0.25: U5.6@7.608,38.641 8.751,39.784 U5.5 U5.5@15.08,39.813 ; U1.1 49.538,44.238 v4(49.963,43.813) ; C2.2 49.773,39.051 50.538,39.816 U1.9 v4(50.538,41.972) ; v4(51.423,42.226) 51.423,41.845 51.538,41.73 U1.11 51.543,41.013 51.543,40.528 52.131,39.94 52.82,39.94 52.82,39.293 C3.2 53.087,39.051 54.611,37.527 C8.1 ; v4(51.55,43.623) 51.55,44.004 51.784,44.238 53.53,44.238 53.995,43.774 C4.1 C1.2 ; v1(56.884,36.384) 56.884,37.249 C8.1@56.908,37.273 ; C11.1@65.139,37.146 65.012,37.273 65.037,37.273 66.083,38.318 66.083,40.375 66.778,41.071 67.008,41.071 C14.2 ; D6.1@67.457,82.745 D6.1@67.489,82.713 ; 69.358,41.365 U2.12 72.533,41.365 72.759,41.591 72.759,42.48 v1(73.267,42.988) ; C13.2 v1(72.505,52.64) ; 73.065,36.182 U2.18 73.065,39.484 v1(74.029,40.448) ; 73.065,49.921 U2.63 73.065,47.61 73.065,47.381 73.065,47.127 74.029,46.163 v1(74.791,46.163) ; v1(78.22,40.829) 79.565,39.484 U2.31 79.565,36.309 ; v1(79.236,45.02) 79.742,45.526 79.742,45.907 80.2,46.365 U2.47 83.503,46.365 84.316,47.178 C16.2 ; v1(86.348,57.466) 86.348,58.99 87.041,59.683 87.688,59.683 C7.2 87.745,61.784 88.578,62.617 RST_BTN1.2
  Top Layer w0.3: U5.5@15.08,39.813 v1(17.895,39.813) ; v1(20.435,39.813) 22.467,39.813 ; 68.85,41.365 69.358,41.365 ; 71.882,35.864 72.695,35.864 73.013,36.182 ; 72.759,50.227 73.065,49.921 ; 79.132,35.876 79.565,36.309
  Top Layer w0.4: C14.2@67.806,41.325 67.846,41.365 68.85,41.365 ; C17.2 71.882,35.864 ; C13.2 72.759,50.862 72.759,50.227 ; C15.2 79.132,35.125 79.132,35.876 ; C16.2@84.316,47.109 C12.2@86.345,47.109
  Top Layer w0.5: v2(7.608,50.354) 4.382,50.354 L3.2 L4.2 4.357,58.228 7.989,58.228 10.49,60.729 C20.2 C21.2
  Top Layer w1.2: v2(7.608,50.354) 7.689,50.354 9.334,51.999 C19.2 13.704,52.999 11.072,55.631 10.967,55.631 v2(10.91,55.688) ; CON1.1@14.123,15.175 8.123,15.175 8.123,25.723 C18.2 4.814,25.97 3.544,27.24 3.544,34.577 U5.6 U5.3 22.308,36.384 D19.1 D19.1@22.467,36.261 ; C24.2 22.467,42.226 22.467,39.813 D19.1@22.467,36.261 ; v2(22.594,65.848) 22.601,65.841 22.601,62.786 AMS1.1 24.732,62.779 25.896,61.615 C22.2 C23.2 ; D19.1@22.717,36.511 D19.1@22.467,36.261 ; v2(27.166,17.207) 29.925,17.207 29.96,17.172 29.96,17.08 30.087,17.207 ; D14.1@29.925,4.126 30.087,4.288 30.087,4.38 ; D6.1 D6.1@67.647,83.247 ; D9.1 D9.1@67.584,66.673 ; 67.679,80.326 v2(69.965,80.326)
  Bottom Layer w0.25: U4.15 40.12,13.016 40.374,13.27 C10.2@41.91,13.27 ; v1(56.884,36.384) 65.139,36.384 ; v1(72.505,52.64) 72.505,53.529 ; JP6.4 JP6.4@79.802,58.101
  Bottom Layer w0.3: v1(17.895,39.813) v1(20.435,39.813)
  Bottom Layer w1.2: 7.608,43.115 v2(7.608,50.354)
LED_3V3: L4.1 R9.1 | length 3.7
  Top Layer w0.5: L4.1 4.306,63.054 4.687,63.435 R9.1
LED_5V: L3.1 R8.1 | length 3.9
  Top Layer w0.5: L3.1 4.306,45.401 4.814,44.893 R8.1
LM2596_OUT: D19.2 L1.1 U5.2 | length 34.8
  Top Layer w1.2: U5.2 18.198,34.684 20.393,32.489 22.33,32.489 D19.2@22.34,32.479 ; D19.2 22.689,32.447 34.21,32.447 34.913,33.15 34.913,46.116 L1.1
MCU_LED: R3.1 U2.2 | length 6.8
  Top Layer w0.25: R3.1 66.143,49.072 67.564,49.072 68.237,48.399 68.237,46.526 68.383,46.38 70.63,46.38 U2.2
MOTOR_BL_CTRL_NEG: D5.1 D9.2 KF2.1 U3.14 | length 72.4
  Top Layer w1.2: D5.1 60.567,66.737 ; U3.14 v2(60.567,80.453) ; v2(60.567,69.531) 60.567,66.737 ; v2(63.615,69.531) 63.568,69.483 63.568,66.784 D9.2 60.567,66.737
  Bottom Layer w1.2: v2(60.567,69.531) 60.656,70.73 60.656,78.624 v2(60.567,80.453) ; v2(63.615,69.531) 67.425,69.531 KF2.1
MOTOR_BL_CTRL_POS: D4.1 D8.2 KF2.2 U3.13 | length 50.7
  Top Layer w1: D4.1 55.487,72.198 ; U3.13 55.487,72.198 ; D8.2 55.487,72.198
  Top Layer w1.2: D8.2 63.568,72.245 63.568,74.899 v2(63.615,74.946)
  Bottom Layer w1.2: v2(63.615,74.946) 67.76,74.946 KF2.2
MOTOR_BL_DIR: U2.10 U3.12 | length 51.5
  Top Layer w0.25: U3.12@54.194,80.43 U3.12 ; v1(67.044,42.607) 67.092,42.559 67.471,42.559 67.568,42.463 69.131,42.463 69.229,42.365 U2.10
  Bottom Layer w0.25: U3.12 51.677,77.913 51.677,65.848 55.614,61.911 55.614,51.751 62.345,45.02 66.663,45.02 67.044,44.639 v1(67.044,42.607)
MOTOR_BL_PWM: U2.43 U3.10 | length 72
  Top Layer w0.25: U2.43 84.296,44.365 v1(84.824,44.893)
  Bottom Layer w0.25: U3.10 51.677,80.966 53.516,82.805 55.675,82.805 56.056,82.424 56.056,81.356 55.983,81.283 cw(c55.806,81.46) 55.982,81.282 55.98,81.28 ccw(c56.757,80.453) 55.723,79.984 56.056,79.249 56.691,78.614 59.358,78.614 59.731,78.241 59.731,71.113 57.961,69.343 57.961,66.565 60.255,64.271 72.939,64.271 75.233,61.977 75.233,56.897 77.011,55.119 81.329,55.119 85.393,51.055 85.393,45.462 v1(84.824,44.893)
MOTOR_BR_CTRL_NEG: D13.1 D17.2 KF4.2 U4.14 | length 73.9
  Top Layer w1.2: D17.2 35.072,19.81 37.707,19.81 ; v2(37.628,17.001) 37.685,17.058 37.685,18.092 37.707,18.113 37.707,19.81 ; v2(37.707,6.158) U4.14 ; v2(63.615,17.08) 63.568,17.127 63.568,19.699 D13.1 63.456,19.81 37.707,19.81
  Bottom Layer w1.2: v2(37.628,17.001) 37.667,16.961 37.667,6.198 v2(37.707,6.158) ; v2(63.615,17.08) 70.473,17.08 81.014,6.539 KF4.2
MOTOR_BR_CTRL_POS: D12.1 D16.2 KF4.1 U4.13 | length 52.3
  Top Layer w1.2: D16.2 42.66,14.413 ; U4.13 42.66,14.413 ; v2(63.615,11.619) 63.583,11.65 63.583,14.381 D12.1 42.66,14.413
  Bottom Layer w1.2: v2(63.615,11.619) 70.6,11.619 75.934,6.285 KF4.1
MOTOR_BR_DIR: U2.11 U4.12 | length 55.5
  Top Layer w0.25: v1(66.409,41.972) 66.45,42.013 68.944,42.013 69.092,41.865 U2.11
  Bottom Layer w0.25: U4.12 46.597,8.825 51.404,8.825 51.55,8.971 51.55,32.574 60.948,41.972 v1(66.409,41.972)
MOTOR_BR_PWM: U2.41 U4.10 | length 70.2
  Top Layer w0.25: U2.41 85.014,43.365 85.264,43.115 v1(85.332,43.115)
  Bottom Layer w0.25: U4.10 47.994,7.682 58.281,7.682 59.678,9.079 59.678,18.096 63.488,21.906 76.569,21.906 84.316,29.653 84.316,42.099 v1(85.332,43.115)
MOTOR_FL_CTRL_NEG: D3.1 D7.2 KF1.2 U3.3 | length 55
  Top Layer w1.2: v2(34.405,74.992) 34.453,75.039 34.453,77.611 D3.1 42.787,77.659 ; U3.3 42.787,77.659 ; D7.2 42.787,77.659
  Bottom Layer w1.2: KF1.2 24.753,75.119 34.197,75.119 34.324,74.992 v2(34.405,74.992)
MOTOR_FL_CTRL_POS: D2.1 D6.2 KF1.1 U3.2 | length 47.9
  Top Layer w1.2: v2(34.4,80.351) 34.4,80.433 34.5,80.533 D2.1 41.644,82.993 ; U3.2 41.597,80.533 41.597,82.946 41.644,82.993 ; D6.2 41.644,82.993
  Bottom Layer w1.2: KF1.1 24.626,80.326 27.039,80.326 27.052,80.339 34.387,80.339 v2(34.4,80.351)
MOTOR_FL_DIR: U2.8 U3.7 | length 46.5
  Top Layer w0.25: v1(66.337,44.127) 66.34,44.13 67.248,44.13 67.955,43.423 69.444,43.423 69.502,43.365 U2.8
  Bottom Layer w0.25: U3.7 47.867,64.451 53.709,58.609 53.709,51.624 61.226,44.107 66.318,44.107 v1(66.337,44.127)
MOTOR_FL_PWM: U2.44 U3.5 | length 63.9
  Top Layer w0.25: v1(46.216,68.007) v1(53.582,68.007) ; U2.44 83.712,44.865 83.994,45.147 v1(84.062,45.147)
  Bottom Layer w0.25: U3.5 45.327,68.896 v1(46.216,68.007) ; v1(53.582,68.007) 54.356,68.007 58.916,63.447 72.124,63.447 73.14,62.431 73.14,56.843 75.68,54.303 80.76,54.303 84.062,51.001 v1(84.062,45.147)
MOTOR_FR_CTRL_NEG: D11.1 D15.2 KF3.1 U4.3 | length 55
  Top Layer w1.2: v2(35.04,11.746) 35.088,11.698 35.088,8.999 D15.2 35.199,8.888 55.233,8.888 ; U4.3 55.28,11.158 55.28,8.935 55.233,8.888 ; D11.1 63.456,8.888 55.233,8.888
  Bottom Layer w1.2: KF3.1 25.934,11.746 v2(35.04,11.746)
MOTOR_FR_CTRL_POS: D10.1 D14.2 KF3.2 U4.2 | length 48.1
  Top Layer w1.2: D14.2 v2(35.04,6.285)
  Top Layer w1.4: D14.2 35.19,3.641 36.179,3.641 36.41,3.872 56.63,3.872 ; U4.2 56.63,3.491 D10.1
  Bottom Layer w1.2: KF3.2 25.553,6.285 v2(35.04,6.285)
MOTOR_FR_DIR: U2.9 U4.7 | length 46.6
  Top Layer w0.25: v1(65.734,43.103) 66.373,43.103 66.484,43.215 67.452,43.215 67.719,42.948 69.282,42.948 69.365,42.865 U2.9
  Bottom Layer w0.25: U4.7 50.28,33.082 60.301,43.103 v1(65.734,43.103)
MOTOR_FR_PWM: U2.42 U4.5 | length 61.2
  Top Layer w0.25: U2.42 84.998,43.865 85.264,44.131 v1(85.332,44.131)
  Bottom Layer w0.25: U4.5 52.82,20.763 55.995,23.938 75.426,23.938 81.903,30.415 81.903,40.702 v1(85.332,44.131)
MPU6050_SCL: R1.2 U1.23 U2.61 | length 41.4
  Top Layer w0.25: U1.23 50.043,44.963 50.043,45.545 50.534,46.036 51.404,46.036 51.55,46.182 51.55,46.901 R1.2 51.55,46.949 v1(51.55,49.846) ; v1(51.55,55.053) 52.82,56.323 72.251,56.323 74.791,53.783 74.791,51.624 74.065,50.898 U2.61
  Bottom Layer w0.25: v1(51.55,49.846) v1(51.55,55.053)
MPU6050_SDA: R2.2 U1.24 U2.62 | length 36.2
  Top Layer w0.25: U1.24 49.538,45.929 49.772,46.163 R2.2 49.899,47.052 49.899,51.37 52.82,54.291 72.251,54.291 73.565,52.977 U2.62
MPU_CPOUT: C4.2 U1.20 | length 3.8
  Top Layer w0.25: U1.20 51.543,44.963 51.543,45.448 51.773,45.678 54.333,45.678 54.362,45.649 54.502,45.649 54.593,45.558 C4.2@54.593,45.419
MPU_REGOUT: C3.1 U1.10 | length 2.2
  Top Layer w0.25: U1.10 51.038,40.452 51.042,40.448 51.042,40.194 51.423,39.813 51.423,39.19 C3.1
NetCON1_3: CON1.3 D18.1 | length 18.4
  Top Layer w1.2: CON1.3@11.373,10.425 15.304,10.425 22.213,17.334 D18.1@22.213,21.903 ; D18.1@22.27,21.868 D18.1
NetL2_2: L2.2 R3.2 | length 2.8
  Top Layer w0.25: L2.2 64.847,46.366 66.028,47.547 R3.2
NRST: C7.1 R4.2 RST_BTN1.1 U2.7 | length 43.8
  Top Layer w0.25: v1(68.187,44.004) 68.255,44.004 68.386,43.873 70.637,43.873 U2.7 ; v1(79.744,50.227) 82.157,52.64 89.269,52.64 91.174,54.545 91.174,55.49 RST_BTN1.1 ; C7.1 87.745,56.577 88.705,55.617 RST_BTN1.1 ; R4.2 94.73,56.45 93.841,55.561 91.357,55.561 RST_BTN1.1
  Bottom Layer w0.25: v1(68.187,44.004) 68.187,46.544 71.87,50.227 v1(79.744,50.227)
OSCIN: C8.2 U2.5 Y1.1 | length 23.5
  Top Layer w0.25: Y1.1 58.535,37.146 58.408,37.273 58.408,44.385 59.28,45.257 68.825,45.257 69.217,44.865 U2.5
OSCOUT: R5.2 U2.6 | length 10.6
  Top Layer w0.25: R5.2 65.139,39.432 65.139,43.837 66.07,44.768 68.597,44.768 68.996,44.369 70.641,44.369 U2.6
OSCOUT_R: C11.2 R5.1 Y1.2 | length 5.6
  Top Layer w0.25: Y1.2 63.435,37.196 63.512,37.273 R5.1
PA0: JP1.1 U2.14 | length 53.4
  Top Layer w0.2: U2.14 70.617,40.337 69.6,40.337 68.695,39.432 68.695,23.811 81.014,11.492 JP1.1@99.048,11.492
PA1: JP1.2 U2.15 | length 49.8
  Top Layer w0.2: U2.15 70.605,39.825 69.723,39.825 69.095,39.197 69.095,26.205 81.268,14.032 JP1.2@99.048,14.032
PA2: JP1.3 U2.16 | length 46.1
  Top Layer w0.2: U2.16 70.04,39.365 69.495,38.82 69.495,28.599 81.522,16.572 JP1.3@99.048,16.572
PA3: JP1.4 U2.17 | length 41.9
  Top Layer w0.2: U2.17 72.565,36.91 72.525,36.87 71.594,36.87 70.346,35.622 70.346,30.415 81.649,19.112 JP1.4@99.048,19.112
PA4: JP1.5 U2.20 | length 37.8
  Top Layer w0.2: U2.20 74.025,37.405 74.025,36.703 74.005,36.683 74.005,36.453 74.41,36.048 74.41,33.971 72.473,32.034 72.473,31.082 81.903,21.652 JP1.5@99.048,21.652
PA5: JP1.6 U2.21 | length 33.4
  Top Layer w0.2: U2.21 74.565,36.483 74.918,36.13 74.918,31.304 82.03,24.192 JP1.6@99.048,24.192
PA6: JP1.7 U2.22 | length 30.9
  Top Layer w0.2: U2.22 75.105,37.405 75.105,36.509 75.553,36.061 75.553,33.082 82.157,26.478 98.437,26.478 98.691,26.732 JP1.7@99.048,26.732
PA7: JP1.8 U2.23 | length 28
  Top Layer w0.2: U2.23 75.605,37.405 75.605,36.637 76.315,35.927 76.315,34.733 81.776,29.272 JP1.8@99.048,29.272
ROSSERIAL_RX: JP2.2 U2.59 | length 41.5
  Top Layer w0.25: U2.59 75.065,49.866 77.712,52.513 80.633,52.513 83.681,55.561 83.681,72.96 85.713,74.992 JP2.2@94.857,74.992
ROSSERIAL_TX: JP2.1 U2.58 | length 37.9
  Top Layer w0.25: U2.58 75.58,48.8 75.58,49.604 77.6,51.624 80.505,51.624 85.459,56.578 85.459,70.42 87.618,72.579 JP2.1
SWDCLK: JP5.3 U2.49 | length 22.2
  Top Layer w0.25: U2.49 80.08,48.8 80.08,49.42 82.284,51.624 90.774,51.624 91.734,50.664 91.734,46.492 JP5.3
SWDIO: JP5.2 U2.46 | length 15
  Top Layer w0.25: U2.46 88.424,45.865 93.46,40.829 JP5.2
pads on no net: U1.2 U1.3 U1.4 U1.5 U1.6 U1.7 U1.12 U1.14 U1.15 U1.16 U1.17 U1.19 U1.21 U1.22 U2.3 U2.4 U2.24 U2.25 U2.26 U2.27 U2.29 U2.30 U2.33 U2.34 U2.35 U2.36 U2.45 U2.50 U2.51 U2.52 U2.53 U2.54 U2.55 U2.56 U2.57

## Polygon pours and split planes (outlines as drawn)
GND on Top Layer "GND" (solid, pour order 10): 0.199,86.075 101.2,86.075 101.2,0.2 0.25,0.2
GND on Bottom Layer "GND" (solid, pour order 11): 0.2,86.075 101.2,86.075 101.2,0.2 0.25,0.2 0.2,0.25

## Other copper
Top Layer:
  rectangle net +12V: 66.155,1.84 69.076,21.398
  rectangle net GND: 66.155,65.086 69.076,84.644
  rectangle net GND: 29.325,1.84 32.627,21.525
  rectangle net +12V: 28.944,64.959 31.865,84.644

## Silkscreen, mask and mechanical layers (free items; w line width, h text height)
Top Overlay:
  text "MECABOT" at 9.925,71.575 h2
  text "20191831" at 85.654,6.204 h2